# EAGLE board Parte 3 - Contador de Programa (EAGLE 9.7.0)

Size 157.65 x 80.51 mm. Coordinates in mm from the lower left corner, seen from the top.
Outline: 0,0 157.66,0 157.66,80.51 0,80.51 0,0
Copper layers (1*16): Top 0.035mm / dielectric 1.5mm / Bottom 0.035mm
Design rules "default": minimum track width 6mil, minimum drill 0.35mm, track to track 6mil, track to pad 6mil, pad to pad 6mil, via to via 6mil, smd to smd 6mil, copper to edge 40mil, drill to drill 6mil, minimum pad ring 10mil, minimum via ring 8mil, stop-mask expansion 4mil, vias tented up to drill 0mil, thermal gap 10mil

## Footprints (pad centres in the part's own frame; a part is rotated, then mirrored left to right if it is on the bottom)
LEDRD254W60D565H860B = drill 0.981 pad 1.581: 1 -1.27,0; 2 1.27,0
1X08 = drill 1.016 long: 1 -8.89,0; 2 -6.35,0; 3 -3.81,0; 4 -1.27,0; 5 1.27,0; 6 3.81,0; 7 6.35,0; 8 8.89,0
BATTERY-GENERIC = drill 1.118 pad 3.15 octagon: + 2.54,0; - -2.54,0
RESAD1016W63L850D250B = drill 0.83 pad 1.43: 1 -5.08,0; 2 5.08,0
DIP787W55P254L958H533Q8B-8P3 = drill 0.852 pad 1.452: 1 -3.81,3.81; 2 -3.81,1.27; 3 -3.81,-1.27; 4 -3.81,-3.81; 5 3.81,-3.81; 6 3.81,-1.27; 7 3.81,1.27; 8 3.81,3.81

## Placement (x,y rotation side)
D1  RED  [LEDRD254W60D565H860B]  106.85,56.3 0 top
D2  RED  [LEDRD254W60D565H860B]  111.93,56.3 0 top
D3  RED  [LEDRD254W60D565H860B]  117.01,56.3 0 top
D4  RED  [LEDRD254W60D565H860B]  122.09,56.3 0 top
JP1  PINHD-1X08_1X08M  [1X08]  88.14,13.34 270 top
P1  BATTERYGENERIC  [BATTERY-GENERIC]  8.26,68.24 180 top
R1  470  [RESAD1016W63L850D250B]  108.12,71.54 90 top
R2  470  [RESAD1016W63L850D250B]  118.28,71.54 90 top
R3  470  [RESAD1016W63L850D250B]  123.36,71.54 90 top
R4  470  [RESAD1016W63L850D250B]  113.2,71.54 90 top
U1  ATtiny25-20PU  [DIP787W55P254L958H533Q8B-8P3]  83.99,52.49 90 top
U2  ATtiny25-20PU  [DIP787W55P254L958H533Q8B-8P3]  94.15,52.49 90 top
U3  ATtiny25-20PU  [DIP787W55P254L958H533Q8B-8P3]  132.25,52.49 90 top
U4  ATtiny25-20PU  [DIP787W55P254L958H533Q8B-8P3]  142.41,52.49 90 top
U5  ATtiny25-20PU  [DIP787W55P254L958H533Q8B-8P3]  147.49,52.49 90 top

## Library data of the parts
D1-D4 = Tinkercad; CATEGORY: Opto-Electronic; SUB-CATEGORY: LED; VALUE: LED_RED
JP1 P1 R1-R4 = Tinkercad
U1-U5 = Tinkercad; CATEGORY: IC_Embedded; CORE: AVR; DESCRIPTION: AVR AVR® ATtiny, Functional Safety (FuSa) Microcontroller IC 8-Bit 20MHz 2KB (1K x 16) FLASH 8-PDIP; MANUFACTURER: Microchip Technology; MPN: ATtiny25-20PU; OPERATING_TEMP: -40°C to 85°C; PART_STATUS: Active; ROHS_COMPLIANT: COMPLIANT; SERIES: ATtiny25; SPEED: 20 MHz; SUB-CATEGORY: Microcontroller; TYPE: AVR Microcontroller

## Nets
D1_C: D1.2 R1.1
D2_C: D2.2 R4.1
D3_C: D3.2 R2.1
D4_C: D4.2 R3.1
P1+: P1.+ U1.1 U1.8 U2.3 U2.5 U2.6 U3.7 U3.8
P1-: P1.- R1.2 R2.2 R3.2 R4.2 U2.4 U3.1 U3.5 U3.6 U4.7 U4.8 U5.4
U1_GND: U1.4 U4.4 U5.2
U1_PB3: JP1.1 U1.2
U1_PB4: U1.3 U5.3
U2_PB2: D1.1 U2.7 U4.6 U5.8
U2_PB3: U2.2 U4.2
U4_PB0: U2.8 U4.5 U5.7
U4_PB4: U2.1 U4.3 U5.1
U5_PB0: U1.6 U5.5
U5_PB1: U1.5 U5.6

## Tracks (layer width: path | path; a pad name or v marks a point on that pad's centre or on a via)
D1_C  (1 unrouted)
D2_C  (1 unrouted)
D3_C  (1 unrouted)
D4_C  (1 unrouted)
P1+  (7 unrouted)
P1-  (11 unrouted)
U1_GND  (2 unrouted)
U1_PB3  (1 unrouted)
U1_PB4  (1 unrouted)
U2_PB2  (3 unrouted)
U2_PB3  (1 unrouted)
U4_PB0  (2 unrouted)
U4_PB4  (2 unrouted)
U5_PB0  (1 unrouted)
U5_PB1  (1 unrouted)